# Altium PCB Input_board.PcbDoc
Units mm, origin at the board's own origin, x right, y up, seen from the top; angles counter-clockwise.
Board outline 23.25 x 13.5 mm, 2 copper layers (Top Layer, Bottom Layer); 21 components, 20 nets, 48 pads, 20 vias.
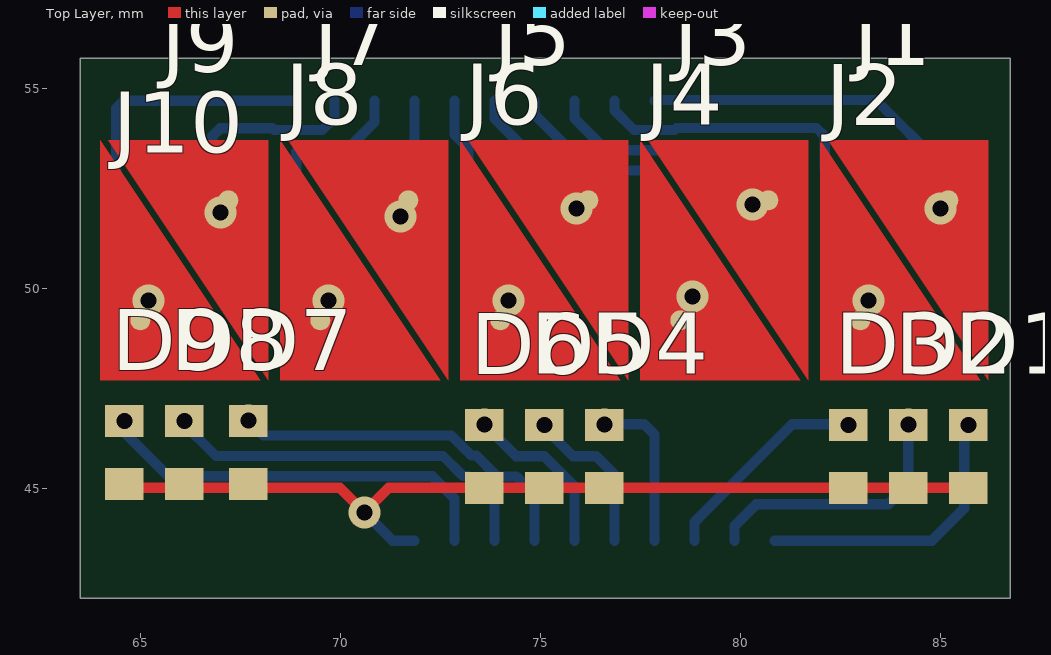
[diagram p0: Top Layer view]
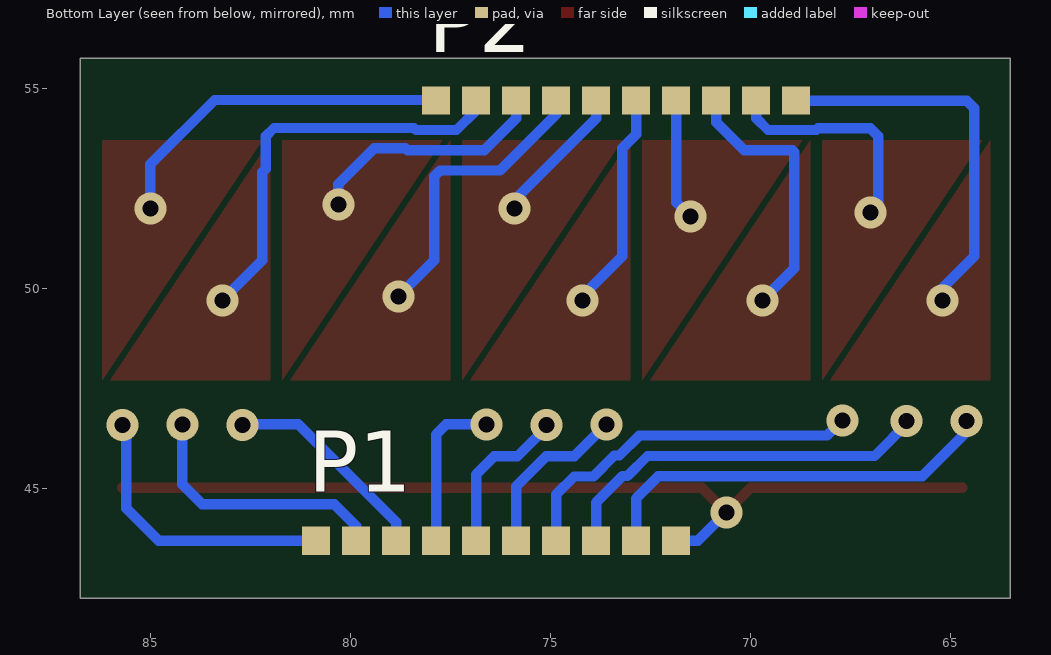
[diagram p1: Bottom Layer view, seen from below]

## Layer stack, top to bottom
Top Layer: signal copper 0.0356
Dielectric: dielectric 0.32, FR-4, Dk 4.8
Bottom Layer: signal copper 0.0356

## Board outline
63.5,55.75 86.75,55.75 86.75,42.25 63.5,42.25

## Design rules (kind name [scope] priority, off if disabled: settings)
Clearance [All] p1: gap=0.254
PolygonConnect [All] p1: connectstyle=Relief reliefconductorwidth=0.254 reliefentries=4 polygonreliefangle="90 Angle" airgapwidth=0.254
RoutingVias [All] p1: holewidth=0.4 width=0.8 viastyle="Through Hole" minholewidth=0.3 minwidth=0.6 maxholewidth=1 maxwidth=2
SolderMaskExpansion [All] p1: expansion=0.102
Width [All] p1: maxlimit=0.254 minlimit=0.254 preferedwidth=0.254
28 further rules are at their usual default settings.

## Components (designator, comment, footprint, x,y, rotation, side; value= is the part's Value field where it differs from the comment)
D1 "Red" 0603 85.7,45.8 r90 top
D2 "Green" 0603 84.2,45.8 r90 top
D3 "Blue" 0603 82.7,45.8 r90 top
D4 "Red" 0603 76.6,45.8 r90 top
D5 "Green" 0603 75.1,45.8 r90 top
D6 "Blue" 0603 73.6,45.8 r90 top
D7 "Red" 0603 67.7,45.9 r90 top
D8 "Green" 0603 66.1,45.9 r90 top
D9 "Blue" 0603 64.6,45.9 r90 top
J1 "Touch_pad" Cap_Slider 85.2,52.2 r180 top
J2 "Touch_pad" Cap_Slider 83,49.2 r0 top
J3 "Touch_pad" Cap_Slider 80.7,52.2 r180 top
J4 "Touch_pad" Cap_Slider 78.5,49.2 r0 top
J5 "Touch_pad" Cap_Slider 76.2,52.2 r180 top
J6 "Touch_pad" Cap_Slider 74,49.2 r0 top
J7 "Touch_pad" Cap_Slider 71.7,52.2 r180 top
J8 "Touch_pad" Cap_Slider 69.5,49.2 r0 top
J9 "Touch_pad" Cap_Slider 67.2,52.2 r180 top
J10 "Touch_pad" Cap_Slider 65,49.2 r0 top
P1 "LED_connector" User_interface_10pin_connector 76.327,43.688 r180 bottom
P2 "Touch_connector" User_interface_10pin_connector 73.327,54.688 r180 bottom

## Footprints (in the part's own frame and the unit in brackets; to place one, negate y for a bottom-side part, rotate by r counter-clockwise, add the part's x,y. Pads: shape width x height; smd on the part's side, far side on the other; paste and mask are expansions set on the pad)
0603 [mm]
  rect 0.8x0.965 smd: 1(-0.787,0) 2(0.788,0)
Cap_Slider [mm]
  round 0.5 smd: 1(0,0)
  Top Layer region: -1,4.5 -1,-1.5 3,-1.5
User_interface_10pin_connector [mm]
  rect 0.7x0.7 smd: 1(-4.525,0) 2(-3.525,0) 3(-2.525,0) 4(-1.525,0) 5(-0.525,0) 6(0.475,0) 7(1.475,0) 8(2.475,0) 9(3.475,0) 10(4.475,0)

## Part data
D1 D2 D3 D4 D5 D6 D7 D8 D9: library part LED0, "Typical INFRARED GaAs LED"
J1 J2 J3 J4 J5 J6 J7 J8 J9 J10: library part Socket, "Socket"
P1 P2: library part "Header 10", "Header, 10-Pin"

## Via types
v1: diameter 0.8, hole 0.4, Top Layer to Bottom Layer, 20 vias

## Nets (pads, with @x,y where several pads share a name; then routed paths per layer and width w, separated by ;. In a path a pad name is that pad's centre, name@x,y a point inside that pad or via, vN(x,y) a via of type N, cw(c..) or ccw(c..) an arc to the next point about the centre after c; other vN are vias at no path point)
NetD1_2: D1.2 P1.1 | length 7.3
  Bottom Layer w0.254: P1.1 84.788,43.688 85.6,44.5 85.6,46.6 85.612,46.588 v1(85.7,46.588)
NetD2_2: D2.2 P1.2 | length 6.6
  Bottom Layer w0.254: P1.2 79.852,44.052 80.4,44.6 83.7,44.6 84.2,45.1 v1(84.2,46.6)
NetD3_2: D3.2 P1.3 | length 5.3
  Bottom Layer w0.254: P1.3 78.852,44.152 81.3,46.6 82.7,46.6 v1(82.7,46.588)
NetD4_2: D4.2 P1.4 | length 4
  Bottom Layer w0.254: v1(76.6,46.6) 77.6,46.6 77.852,46.348 P1.4
NetD5_2: D5.2 P1.5 | length 4
  Bottom Layer w0.254: v1(75.1,46.588) 75.1,46.5 75.292,46.308 75.31,46.308 75.818,45.8 76.4,45.8 76.852,45.348 P1.5
NetD6_2: D6.2 P1.6 | length 4.3
  Bottom Layer w0.254: v1(73.6,46.6) 74.4,45.8 75.1,45.8 75.852,45.048 P1.6
NetD7_2: D7.2 P1.7 | length 9.1
  Bottom Layer w0.254: v1(67.7,46.7) 68.084,46.316 72.779,46.316 73.277,45.819 73.399,45.819 73.926,45.292 74.408,45.292 74.852,44.848 P1.7
NetD8_2: D8.2 P1.8 | length 9.8
  Top Layer w0.254: D8.2@66,46.7 66.012,46.688 v1(66.1,46.688)
  Bottom Layer w0.254: v1(66.1,46.688) 66.012,46.688 66.892,45.808 72.569,45.808 73.066,45.311 73.189,45.311 73.852,44.648 P1.8
NetD9_2: D9.2 P1.9 | length 10.3
  Bottom Layer w0.254: v1(64.6,46.688) 64.6,46.4 65.7,45.3 72.3,45.3 72.852,44.748 P1.9
NetJ1_1: J1.1 P2.1 | length 8.9
  Bottom Layer w0.254: P2.1 77.872,54.708 83.392,54.708 85,53.1 v1(85,52)
NetJ2_1: J2.1 P2.2 | length 10.4
  Bottom Layer w0.254: P2.2 76.852,54.449 77.344,53.957 78.36,53.957 78.411,54.008 81.906,54.008 82.114,53.8 82.114,52.986 82.2,52.9 82.2,50.7 v1(83.2,49.7)
NetJ3_1: J3.1 P2.3 | length 6.1
  Bottom Layer w0.254: P2.3 75.852,54.248 76.651,53.449 78.57,53.449 78.621,53.5 79.4,53.5 80.3,52.6 v1(80.3,52.1)
NetJ4_1: J4.1 P2.4 | length 7.4
  Bottom Layer w0.254: P2.4 74.852,54.348 76.259,52.941 77.759,52.941 77.9,52.8 77.9,50.7 v1(78.8,49.8)
NetJ5_1: J5.1 P2.5 | length 3.5
  Bottom Layer w0.254: P2.5 73.852,54.248 75.9,52.2 v1(75.9,52)
NetJ6_1: J6.1 P2.6 | length 5.7
  Bottom Layer w0.254: P2.6 72.852,53.848 73.2,53.5 73.2,50.8 74.3,49.7 v1(74.2,49.7)
NetJ7_1: J7.1 P2.7 | length 3
  Bottom Layer w0.254: v1(71.5,51.8) 71.852,52.152 P2.7
NetJ8_1: J8.1 P2.8 | length 6.8
  Bottom Layer w0.254: v1(69.7,49.7) 68.9,50.5 68.9,53.4 68.949,53.449 70.149,53.449 70.852,54.152 P2.8
NetJ9_1: J9.1 P2.9 | length 5.7
  Bottom Layer w0.254: v1(67,51.9) 66.8,52.1 66.8,53.8 67,54 68.301,54 68.344,53.957 69.557,53.957 69.852,54.252 P2.9
NetJ10_1: J10.1 P2.10 | length 9.7
  Bottom Layer w0.254: v1(65.2,49.7) 65.2,50 64.4,50.8 64.4,54.5 64.588,54.688 P2.10
VOUT: D1.1 D2.1 D3.1 D4.1 D5.1 D6.1 D7.1 D8.1 D9.1 P1.10 | length 23.1
  Top Layer w0.254: D9.1@64.7,45.013 69.988,45.013 v1(70.6,44.4) 71.213,45.013 D6.1 D5.1 D4.1 D3.1 D2.1 D1.1
  Bottom Layer w0.254: v1(70.6,44.4) 71.312,43.688 P1.10